# Altium PCB CT310高端控制盒基板电路V1.0.PcbDoc (part 4 of 8)
Units mil, origin at the board's own origin, x right, y up, seen from the top; angles counter-clockwise.
Board outline 8162.61 x 6196.81 mil, 2 copper layers (Top Layer, Bottom Layer), stack 65.792 mil thick; 265 components, 178 nets, 926 pads, 298 vias.
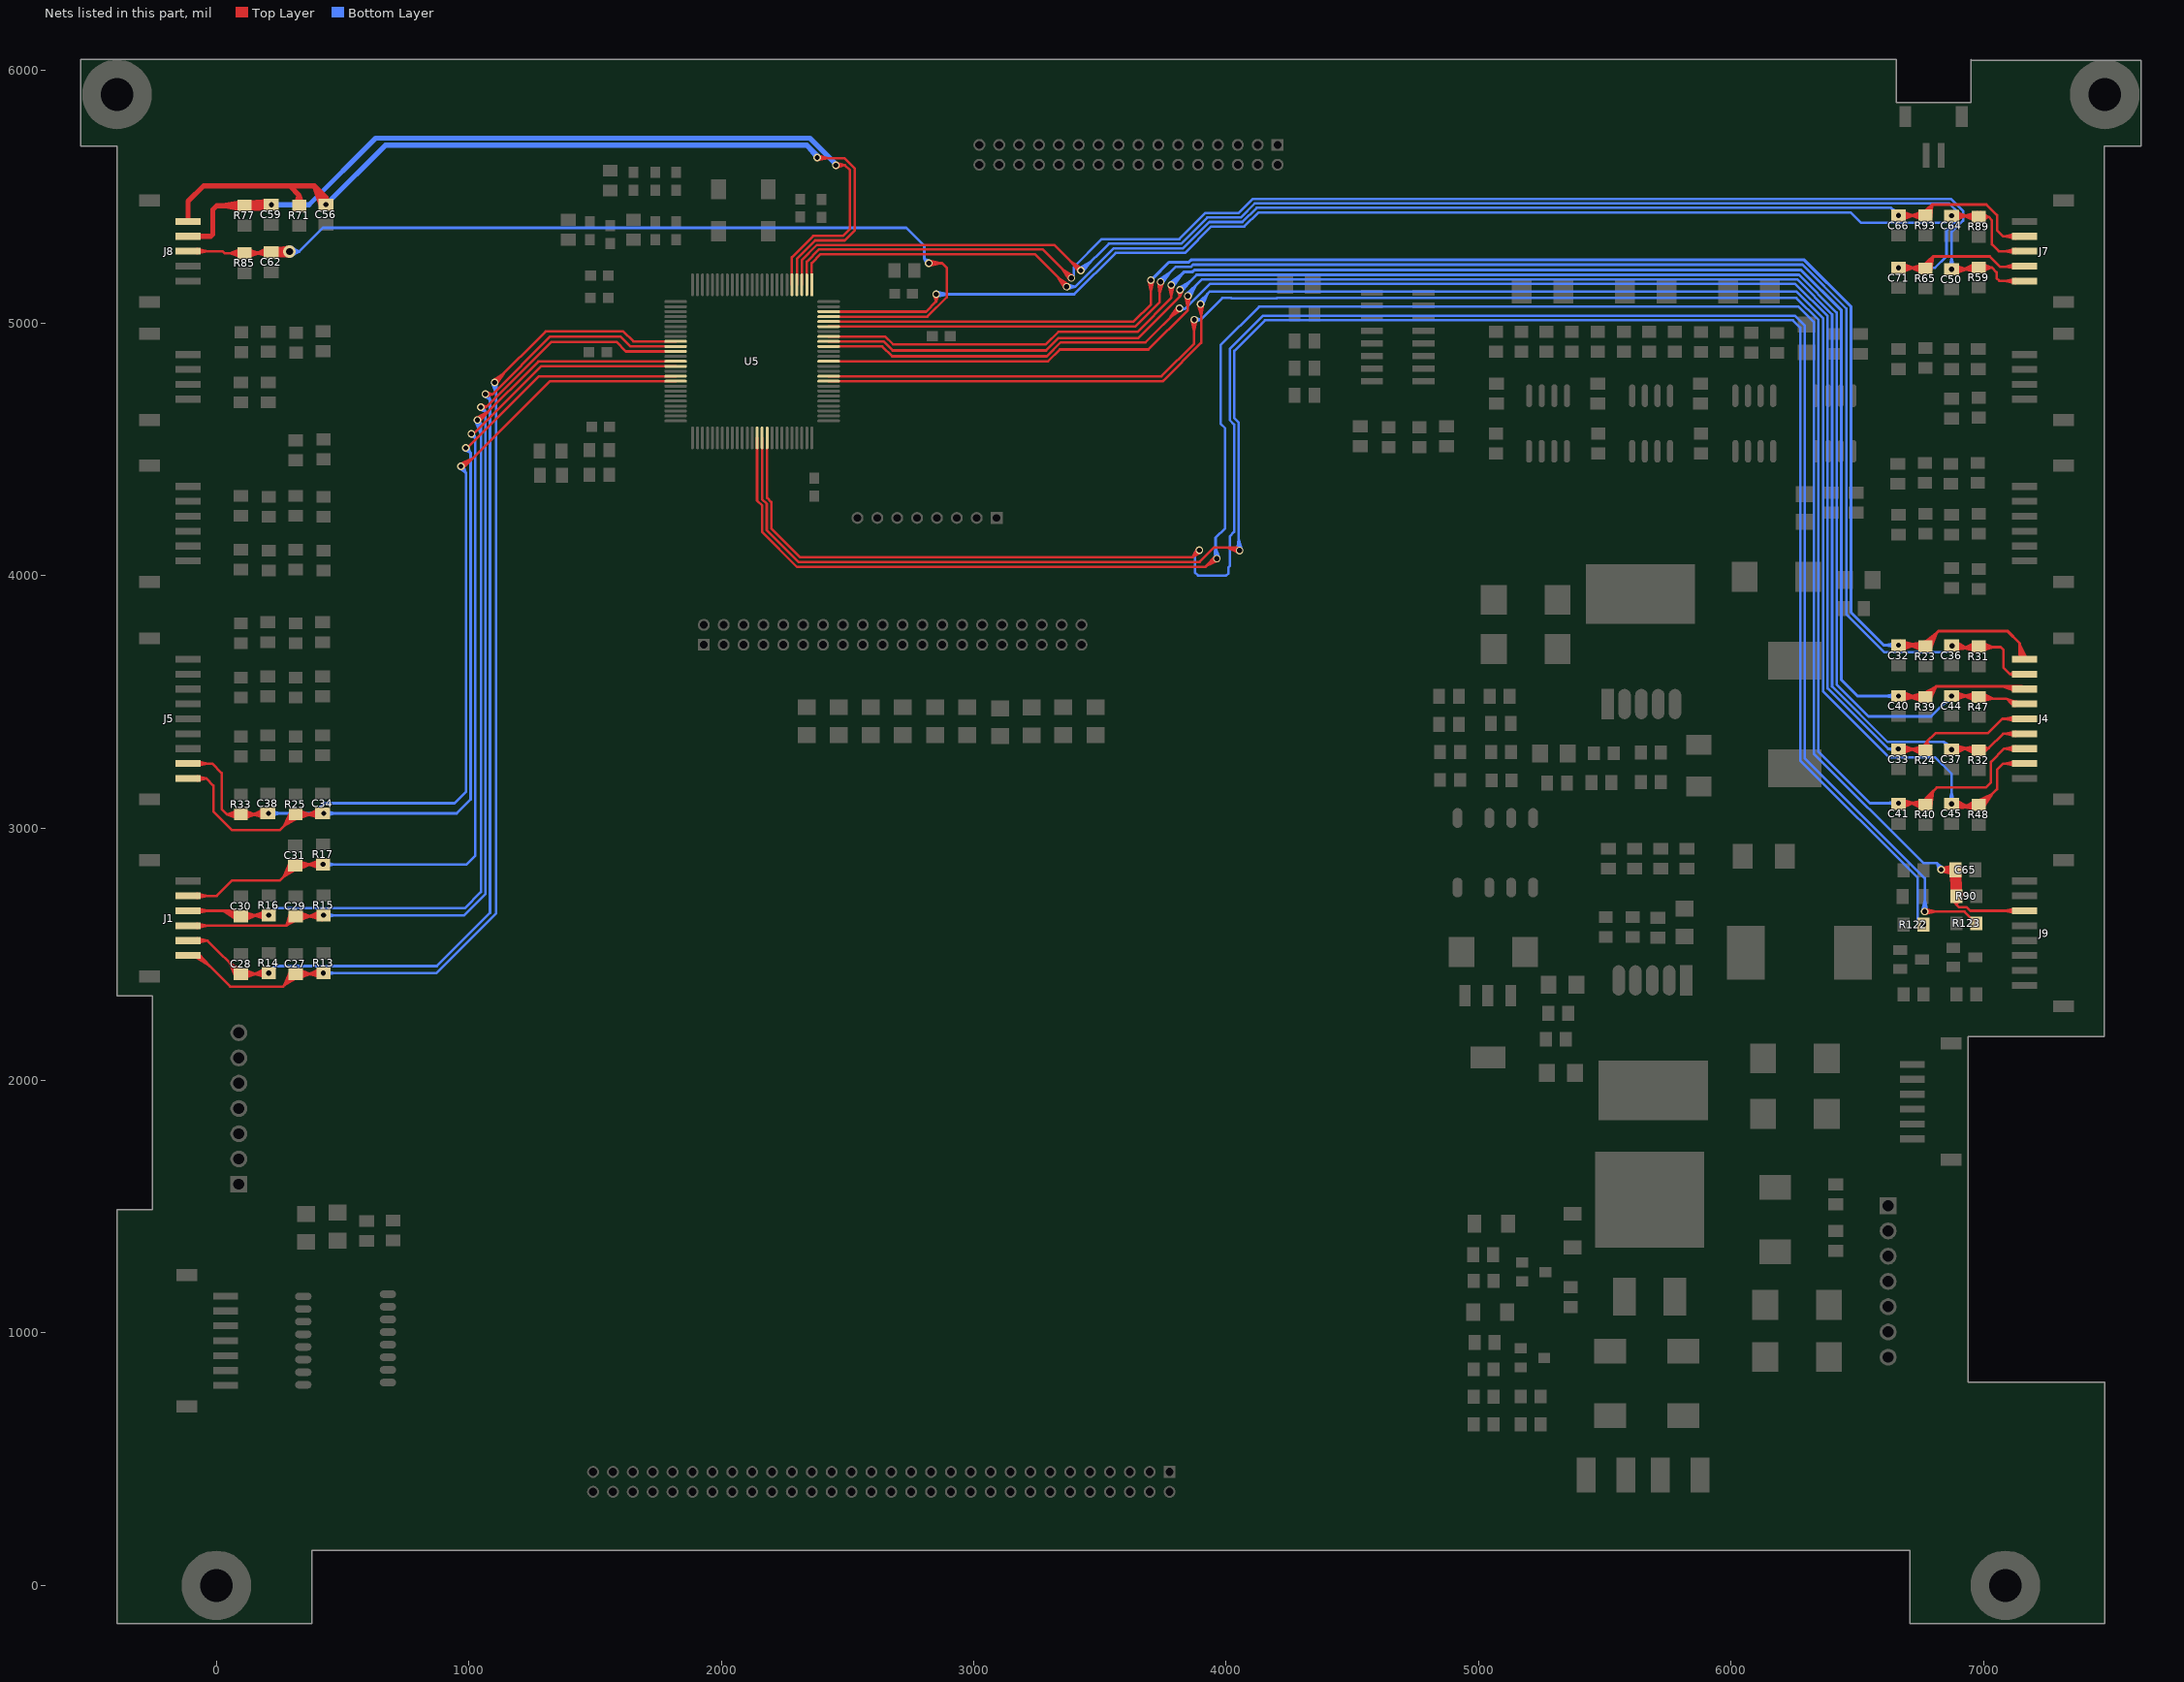
[diagram p4: the nets of this part, all layers, seen from the top]

## Via types
v1: diameter 30, hole 20, Top Layer to Bottom Layer, tented both sides, 226 vias
v2: diameter 60, hole 30, Top Layer to Bottom Layer, tented both sides, 32 vias
v3: diameter 50, hole 30, Top Layer to Bottom Layer, tented both sides, 20 vias
v4: diameter 80, hole 50, Top Layer to Bottom Layer, tented both sides, 10 vias
v5: diameter 50, hole 28, Top Layer to Bottom Layer, tented both sides, 8 vias
v6: diameter 24, hole 16, Top Layer to Bottom Layer, tented both sides, 1 vias
v7: diameter 30, hole 16, Top Layer to Bottom Layer, tented both sides, 1 vias

## Nets (pads, with @x,y where several pads share a name; then routed paths per layer and width w, separated by ;. In a path a pad name is that pad's centre, name@x,y a point inside that pad or via, vN(x,y) a via of type N, cw(c..) or ccw(c..) an arc to the next point about the centre after c; other vN are vias at no path point) (continued)
KEYSWIN_G2: C65.1 J9.3 R90.1 U5.64 | length 10802.8
  Top Layer w10: 2141.98,4470.15 U5.64@2141.98,4505.9 ; U5.64@2141.98,4545.15 2141.98,4296.3 2162,4276.28 2162,4172.18 2300.18,4034 3917,4034 3950,4067 v1(3963,4067) 3921.05,4038.05 ; v1@3956.54,4074.63 3921.05,4038.05 ; v1@3967.85,4058.25 3921.05,4038.05 ; R90.1@6875.21,2720.08 6892.92,2695.67 ; R90.1@6884.39,2724.6 6892.92,2695.67 ; R90.1@6892.92,2725.83 6892.92,2695.67 ; R90.1@6892.92,2729.77 6892.92,2695.67 ; R90.1@6901.46,2724.6 6892.92,2695.67 ; R90.1@6910.64,2720.08 6892.92,2695.67 ; J9.3@7126.21,2663.14 7083.31,2671.88 ; J9.3@7126.21,2680.61 7083.31,2671.88 ; J9.3@7127.09,2671.88 7083.31,2671.88 ; J9.3@7162.52,2671.88 6947.54,2671.88 6932.42,2687 6901.59,2687 6892.92,2695.67
  Top Layer w20: C65.1@6875.37,2828.65 R90.1@6880.56,2744.94 ; C65.1@6875.41,2827.28 R90.1@6888.99,2744.77 ; C65.1@6875.47,2826.73 R90.1@6892.4,2744.8 ; C65.1@6875.84,2824.84 R90.1@6904.33,2745.36 ; R90.1@6879.31,2734.17 C65.1@6888.99,2817.51 ; R90.1@6892.92,2729.77 6888.99,2733.71 C65.1@6888.99,2834.3 ; R90.1@6892.92,2733.71 C65.1@6888.99,2817.51 ; C65.1@6902.38,2825.93 R90.1@6880.56,2744.94 ; C65.1@6902.54,2829.78 R90.1@6904.33,2745.36 ; C65.1@6902.56,2827.28 R90.1@6888.99,2744.77 ; C65.1@6902.6,2827.84 R90.1@6892.4,2744.8 ; R90.1@6906.44,2735.45 C65.1@6888.99,2817.51 ; v1(6832,2835) C65.1@6888.99,2834.3 ; v1(6832,2835) C65.1@6888.99,2834.3 ; v1(6832,2835) 6887.34,2847.82 v1@6832.7,2834.3 ; v1(6832,2835) 6887.34,2820.77 v1@6832.7,2834.3 ; v1(6832,2835) v1@6832.7,2834.3 ; v1@6832.7,2834.3 C65.1@6888.99,2834.3 ; v1@6832.7,2834.3 C65.1@6888.99,2834.3 ; R90.1@6880.56,2744.94 C65.1@6888.99,2828.39 ; R90.1@6888.99,2744.77 C65.1@6888.99,2828.39 ; C65.1@6888.99,2828.39 R90.1@6892.4,2744.8 ; C65.1@6888.99,2828.39 R90.1@6904.33,2745.36
  Bottom Layer w10: v1@3953,4067 3958,4112.8 ; v1@3972.76,4069.16 3958,4112.8 ; v1@6822.81,2831.06 6815.71,2860.29 ; v1@6839.39,2841.74 6815.71,2860.29 ; 3958,4112.8 v1(3963,4067) 3958,4072 3958,4149.54 3995.73,4187.27 3995.73,4583.18 3978,4600.91 3978,4912.11 4130.89,5065 6267.37,5065 6328,5004.37 6328,3294.54 6762.25,2860.29 6815.71,2860.29 ; 6815.71,2860.29 v1(6832,2835) 6832,2844 6815.71,2860.29
KEYSWIN_H1: C27.1 J1.1 R13.1 U5.34 | length 6497
  Top Layer w10: J1.1@-111.93,2494.71 -67.71,2494.71 55,2372 264.3,2372 C27.1@313.97,2421.68 R13.1@423.65,2421.68 ; J1.1@-81.62,2487.58 -26.02,2453.02 ; J1.1@-76.5,2494.71 -26.02,2453.02 ; J1.1@-70.47,2501.09 -26.02,2453.02 ; C27.1@292.27,2431.53 269.14,2376.84 ; C27.1@301.17,2426.84 269.14,2376.84 ; C27.1@308.07,2421.68 269.14,2376.84 ; C27.1@314.15,2415.56 269.14,2376.84 ; C27.1@319.88,2421.68 373.5,2421.68 ; C27.1@320.04,2407.41 269.14,2376.84 ; C27.1@320.57,2413.08 373.5,2421.68 ; C27.1@320.57,2430.27 373.5,2421.68 ; C27.1@323.11,2403.34 373.5,2421.68 ; C27.1@323.11,2440.01 373.5,2421.68 ; R13.1@413.65,2425.11 R13.1@418.46,2407.08 ; R13.1@415.78,2443.67 366.54,2421.68 ; R13.1@419.01,2434.13 366.54,2421.68 ; R13.1@420.27,2416.99 366.54,2421.68 ; R13.1@420.33,2425.61 366.54,2421.68 ; R13.1@421.7,2434.81 376.8,2420.78 ; R13.1@421.83,2434.83 378.38,2421.68 ; R13.1@422.01,2434.86 378.67,2422.56 ; R13.1@422.2,2434.89 366.54,2421.68 ; R13.1@422.38,2434.92 375.81,2423.88 ; R13.1@422.84,2415.03 375.81,2423.88 ; R13.1@423.08,2415.02 378.67,2422.56 ; R13.1@423.28,2415.01 378.38,2421.68 ; R13.1@423.36,2415 366.54,2421.68 ; R13.1@423.49,2415 376.8,2420.78 ; R13.1@424.26,2425.61 v1(423.65,2425) ; R13.1@432.16,2419.74 R13.1@418.46,2407.08 ; v1@1095.65,4772.73 1138.21,4801.21 v1@1109.73,4758.65 ; v1(1102,4765) 1304,4967 1611.59,4967 1651.56,4927.03 U5.34@1819.15,4927.03 ; 1744.15,4927.03 U5.34@1779.9,4927.03 ; 366.54,2421.68 v1(423.65,2425) ; 366.54,2421.68 R13.1@418.46,2407.08 ; 375.81,2423.88 v1(423.65,2425) ; 376.8,2420.78 v1(423.65,2425) ; 378.38,2421.68 v1(423.65,2425) ; 378.67,2422.56 v1(423.65,2425) ; R13.1@418.46,2407.08 v1(423.65,2425)
  Bottom Layer w10: v1(423.65,2425) 870.46,2425 1108,2662.54 v1@1108,4770 ; v1@424.76,2415.06 468.65,2425 v1@424.76,2434.94 ; v1@1092.28,4762.64 1108,4719.13 ; v1(1102,4765) 1108,4719.13 ; v1@1112,4765.22 1108,4719.13
KEYSWIN_H2: C28.1 J1.2 R14.1 U5.35 | length 6509.1
  Top Layer w10: J1.2@-111.93,2553.77 -34.76,2553.77 ; J1.2@-76.5,2553.77 -34.76,2553.77 ; J1.2@-75.58,2545.04 -34.76,2553.77 ; J1.2@-75.58,2562.5 -34.76,2553.77 ; C28.1@75.62,2411.82 52.49,2466.51 ; C28.1@84.52,2416.51 52.49,2466.51 ; C28.1@91.42,2421.68 52.49,2466.51 ; C28.1@97.5,2427.79 52.49,2466.51 ; C28.1@103.23,2421.68 156.85,2421.68 ; C28.1@103.39,2435.94 52.49,2466.51 ; C28.1@103.93,2413.08 156.85,2421.68 ; C28.1@103.93,2430.27 156.85,2421.68 ; C28.1@106.47,2403.34 156.85,2421.68 ; C28.1@106.47,2440.01 156.85,2421.68 ; R14.1@197.63,2426.04 R14.1@201.82,2407.08 ; R14.1@197.79,2423.76 R14.1@199.14,2443.67 ; R14.1@202.37,2434.13 149.88,2421.68 ; R14.1@203.62,2416.99 149.88,2421.68 ; R14.1@203.68,2421.68 C28.1@97.33,2421.68 -34.76,2553.77 ; R14.1@203.68,2425.61 149.88,2421.68 ; R14.1@205.55,2435.4 160.41,2420.76 ; R14.1@205.67,2435.42 162.11,2421.68 ; R14.1@205.85,2435.45 162.68,2422.61 ; R14.1@206.25,2435.52 159.9,2424.06 ; R14.1@206.9,2415.64 159.9,2424.06 ; R14.1@207.17,2415.62 162.68,2422.61 ; R14.1@207.39,2415.61 162.11,2421.68 ; R14.1@207.59,2415.61 160.41,2420.76 ; R14.1@215.32,2431.99 R14.1@199.14,2443.67 ; R14.1@216.07,2420.27 R14.1@201.82,2407.08 ; v1(1066,4718) 1094.6,4718 ; v1@1067.75,4708.15 1094.6,4718 ; v1@1067.75,4727.85 1094.6,4718 ; 1744.15,4907.35 U5.35@1779.9,4907.35 ; U5.35@1819.15,4907.35 1640.24,4907.35 1601.3,4946.3 1322.89,4946.3 1094.6,4718 ; 149.88,2421.68 v1(207.62,2425.61) ; 149.88,2421.68 206.08,2435.49 149.88,2421.68 ; 149.88,2421.68 207.43,2415.61 149.88,2421.68 ; 149.88,2421.68 v1(207.62,2425.61) ; 149.88,2421.68 R14.1@199.14,2443.67 ; 149.88,2421.68 R14.1@201.82,2407.08 ; 159.9,2424.06 v1(207.62,2425.61) ; 160.41,2420.76 v1(207.62,2425.61) ; 162.11,2421.68 v1(207.62,2425.61) ; 162.68,2422.61 v1(207.62,2425.61) ; R14.1@199.14,2443.67 v1(207.62,2425.61) ; R14.1@201.82,2407.08 v1(207.62,2425.61)
  Bottom Layer w10: v1@201.52,2433.54 235.01,2453 ; v1(207.62,2425.61) 235.01,2453 ; v1@215.54,2419.51 235.01,2453 ; v1@1059.41,4710.48 1084,4695.6 ; v1@1063.8,4715.8 1084,4695.6 ; v1(1066,4718) 1084,4695.6 ; v1@1074.77,4722.81 1084,4695.6 ; 235.01,2453 873,2453 1084,2664 1084,4695.6
KEYSWIN_H3: C29.1 J1.3 R15.1 U5.36 | length 6209.3
  Top Layer w10: J1.3@-111.93,2612.82 276.62,2612.82 ; J1.3@-76.5,2612.82 -32.72,2612.82 ; J1.3@-75.62,2604.09 -32.72,2612.82 ; J1.3@-75.62,2621.56 -32.72,2612.82 ; C29.1@291.8,2659.23 276.62,2612.82 ; C29.1@301.01,2655.12 276.62,2612.82 ; C29.1@308.07,2650.18 276.62,2612.82 ; C29.1@314.15,2644.06 276.62,2612.82 ; C29.1@319.77,2635.69 276.62,2612.82 ; C29.1@319.88,2650.18 373.5,2650.18 ; C29.1@320.57,2641.58 373.5,2650.18 ; C29.1@320.57,2658.77 373.5,2650.18 ; C29.1@323.11,2631.84 373.5,2650.18 ; C29.1@323.11,2668.51 373.5,2650.18 ; R15.1@414.27,2654.54 R15.1@418.46,2635.58 ; R15.1@414.44,2652.26 R15.1@415.78,2672.17 ; R15.1@419.01,2662.63 366.52,2650.18 ; R15.1@420.27,2645.49 366.52,2650.18 ; R15.1@420.33,2650.18 C29.1@313.97,2650.18 276.62,2612.82 ; R15.1@420.33,2654.11 366.52,2650.18 ; R15.1@422.2,2663.9 377.06,2649.26 ; R15.1@422.32,2663.92 378.75,2650.18 ; R15.1@422.5,2663.95 379.33,2651.11 ; R15.1@422.89,2664.02 376.55,2652.56 ; R15.1@423.54,2644.14 376.55,2652.56 ; R15.1@423.82,2644.12 379.33,2651.11 ; R15.1@424.03,2644.11 378.75,2650.18 ; R15.1@424.23,2644.11 377.06,2649.26 ; R15.1@431.96,2660.49 R15.1@415.78,2672.17 ; R15.1@432.72,2648.77 R15.1@418.46,2635.58 ; v1(1048,4667) 1069.05,4667 ; v1@1050.37,4657.29 1069.05,4667 ; v1@1050.37,4676.71 1069.05,4667 ; 1744.15,4887.66 U5.36@1779.9,4887.66 ; U5.36@1819.15,4887.66 1621.93,4887.66 1584.3,4925.3 1327.35,4925.3 1069.05,4667 ; 366.52,2650.18 v1(424.26,2654.11) ; 366.52,2650.18 422.73,2663.99 366.52,2650.18 ; 366.52,2650.18 424.08,2644.11 366.52,2650.18 ; 366.52,2650.18 v1(424.26,2654.11) ; 366.52,2650.18 R15.1@415.78,2672.17 ; 366.52,2650.18 R15.1@418.46,2635.58 ; 376.55,2652.56 v1(424.26,2654.11) ; 377.06,2649.26 v1(424.26,2654.11) ; 378.75,2650.18 v1(424.26,2654.11) ; 379.33,2651.11 v1(424.26,2654.11) ; R15.1@415.78,2672.17 v1(424.26,2654.11) ; R15.1@418.46,2635.58 v1(424.26,2654.11)
  Bottom Layer w10: v1(424.26,2654.11) 981.57,2654.11 1066,2738.54 1066,4649 ; v1@425.38,2644.17 469.26,2654.11 v1@425.38,2664.05 ; v1@1042.46,4658.68 1066,4649 ; v1(1048,4667) 1066,4649 ; v1@1056.32,4672.54 1066,4649
KEYSWIN_H4: C30.1 J1.4 R16.1 U5.38 | length 6404.2
  Top Layer w10: J1.4@-111.93,2671.88 75.62,2671.88 93.39,2654.11 v1(207.62,2654.11) ; J1.4@-76.5,2671.88 -32.72,2671.88 ; J1.4@-75.62,2663.14 -32.72,2671.88 ; J1.4@-75.62,2680.61 -32.72,2671.88 ; C30.1@83.29,2633.42 25.41,2671.88 ; C30.1@88.23,2642.17 25.41,2671.88 ; C30.1@91.42,2650.18 25.41,2671.88 ; C30.1@93.6,2658.52 25.41,2671.88 ; C30.1@94.82,2668.49 25.41,2671.88 ; C30.1@103.23,2650.18 156.98,2654.11 ; C30.1@103.29,2658.8 156.98,2654.11 ; C30.1@104.55,2641.65 156.98,2654.11 ; C30.1@105.1,2668.7 156.98,2654.11 ; C30.1@107.78,2632.12 156.98,2654.11 ; R16.1@197.69,2652.95 R16.1@200.45,2672.45 ; R16.1@197.69,2655.27 R16.1@200.45,2635.77 ; R16.1@202.99,2645.52 150.06,2654.11 ; R16.1@202.99,2662.71 150.06,2654.11 ; R16.1@203.68,2654.11 150.06,2654.11 ; R16.1@206.23,2644.21 160.08,2655.74 ; R16.1@206.23,2664.01 160.08,2652.48 ; R16.1@206.91,2644.14 160.08,2652.48 ; R16.1@206.91,2664.09 160.08,2655.74 ; R16.1@215.7,2648.22 R16.1@200.45,2635.77 ; R16.1@215.7,2660 R16.1@200.45,2672.45 ; v1@1028.67,4624.46 1075.63,4648.12 ; v1@1040.83,4608.7 1075.63,4648.12 ; 1744.14,4847.9 U5.38@1779.9,4848.29 ; U5.38@1819.15,4848.29 1818.75,4847.9 1275.41,4847.9 1043.51,4616 v1(1034,4616) 1075.63,4648.12 ; 150.06,2654.11 v1(207.62,2654.11) ; 150.06,2654.11 206.75,2664.07 150.06,2654.11 ; 150.06,2654.11 206.75,2644.15 150.06,2654.11 ; 150.06,2654.11 v1(207.62,2654.11) ; 150.06,2654.11 R16.1@200.45,2672.45 ; 150.06,2654.11 R16.1@200.45,2635.77 ; 160.08,2652.48 v1(207.62,2654.11) ; 160.08,2655.74 v1(207.62,2654.11) ; 162.62,2654.11 v1(207.62,2654.11) ; 162.62,2654.11 206.51,2664.05 162.62,2654.11 ; 162.62,2654.11 206.51,2644.17 162.62,2654.11 ; R16.1@200.45,2635.77 v1(207.62,2654.11) ; R16.1@200.45,2672.45 v1(207.62,2654.11)
  Bottom Layer w10: v1@201.5,2662.02 235.62,2682.11 ; v1(207.62,2654.11) 235.62,2682.11 ; v1@215.53,2647.99 235.62,2682.11 ; v1@1024.51,4612.84 1048,4558.08 ; v1@1043.88,4617.53 1048,4558.08 ; 235.62,2682.11 984.11,2682.11 1048,2746 1048,4602 v1(1034,4616) 1048,4558.08
KEYSWIN_H5: C31.1 J1.5 R17.1 U5.39 | length 5911.7
  Top Layer w10: J1.5@-111.93,2730.93 1.93,2730.93 63,2792 252.05,2792 C31.1@311.97,2851.93 315.91,2855.86 v1(422.26,2855.86) ; J1.5@-76.5,2730.93 -32.72,2730.93 ; J1.5@-75.62,2722.2 -32.72,2730.93 ; J1.5@-75.62,2739.67 -32.72,2730.93 ; C31.1@290.27,2861.78 267.14,2807.09 ; C31.1@299.17,2857.09 267.14,2807.09 ; C31.1@306.07,2851.93 267.14,2807.09 ; C31.1@312.15,2845.81 267.14,2807.09 ; C31.1@317.88,2851.93 371.66,2855.86 ; C31.1@317.94,2860.55 371.66,2855.86 ; C31.1@318.04,2837.66 267.14,2807.09 ; C31.1@319.19,2843.4 371.66,2855.86 ; C31.1@319.75,2870.45 371.66,2855.86 ; C31.1@322.43,2833.87 371.66,2855.86 ; R17.1@412.33,2854.7 R17.1@415.09,2874.2 ; R17.1@412.33,2857.02 R17.1@415.09,2837.52 ; R17.1@417.63,2847.27 364.71,2855.86 ; R17.1@417.63,2864.46 364.71,2855.86 ; R17.1@418.33,2855.86 364.71,2855.86 ; R17.1@420.87,2845.96 374.73,2857.49 ; R17.1@420.87,2865.76 374.73,2854.23 ; R17.1@421.55,2845.89 374.73,2854.23 ; R17.1@421.55,2865.84 374.73,2857.49 ; R17.1@430.35,2849.97 R17.1@415.09,2837.52 ; R17.1@430.35,2861.75 R17.1@415.09,2874.2 ; v1(1010,4561) 1018.6,4561 1285.81,4828.21 1818.75,4828.21 U5.39@1819.15,4828.61 ; 1744.14,4828.21 U5.39@1779.9,4828.61 ; 364.71,2855.86 v1(422.26,2855.86) ; 364.71,2855.86 421.4,2865.82 364.71,2855.86 ; 364.71,2855.86 421.4,2845.9 364.71,2855.86 ; 364.71,2855.86 v1(422.26,2855.86) ; 364.71,2855.86 R17.1@415.09,2874.2 ; 364.71,2855.86 R17.1@415.09,2837.52 ; 374.73,2854.23 v1(422.26,2855.86) ; 374.73,2857.49 v1(422.26,2855.86) ; 377.26,2855.86 v1(422.26,2855.86) ; 377.26,2855.86 421.15,2865.8 377.26,2855.86 ; 377.26,2855.86 421.15,2845.92 377.26,2855.86 ; R17.1@415.09,2837.52 v1(422.26,2855.86) ; R17.1@415.09,2874.2 v1(422.26,2855.86)
  Bottom Layer w10: v1(422.26,2855.86) 990.86,2855.86 1026,2891 1026,4545 ; v1@423.38,2845.92 467.26,2855.86 v1@423.38,2865.8 ; v1@1004.67,4552.54 1026,4545 ; v1(1010,4561) 1026,4545 ; v1@1018.46,4566.33 1026,4545
KEYSWIN_I1: C50.1 J7.5 R59.1 U5.2 | length 7180.5
  Top Layer w10: U5.2@2338.83,5151.44 2338.83,5243.46 2386.37,5291 3274,5291 3375,5190 v1(3387,5178) 3350.79,5214.21 ; U5.2@2338.83,5190.69 2338.83,5226.44 ; v1@3379.27,5171.65 3350.79,5214.21 ; v1@3393.35,5185.73 3350.79,5214.21 ; C50.1@6873.97,5202.69 6921.39,5210.81 ; C50.1@6873.97,5222.64 6921.39,5214.53 ; C50.1@6874.74,5202.77 6921.39,5214.53 ; C50.1@6874.74,5222.56 6921.39,5210.81 ; C50.1@6879.22,5212.67 6932.84,5212.67 ; C50.1@6879.92,5204.07 6932.84,5212.67 ; C50.1@6879.92,5221.26 6932.84,5212.67 ; C50.1@6882.46,5194.33 6932.84,5212.67 ; C50.1@6882.46,5231 6932.84,5212.67 ; R59.1@6970.87,5237.46 6922.09,5212.67 ; R59.1@6974.59,5228.1 6922.09,5212.67 ; R59.1@6975.56,5201.06 6922.09,5212.67 ; R59.1@6976.36,5219.67 6922.09,5212.67 ; R59.1@6976.78,5211.05 6922.09,5212.67 ; R59.1@6984.23,5219.67 7032.93,5219.67 ; R59.1@6985,5211.08 7032.93,5219.67 ; R59.1@6985,5228.25 7032.93,5219.67 ; R59.1@6987.79,5201.39 7032.93,5219.67 ; R59.1@6987.79,5237.94 7032.93,5219.67 ; J7.5@7125.99,5157.47 7083.31,5167.3 ; J7.5@7126.43,5174.94 7083.31,5167.3 ; J7.5@7127.09,5166.18 7083.31,5167.3 ; J7.5@7162.52,5166.18 7161.41,5167.3 7062.3,5167.3 7051.3,5178.3 7051.3,5201.3 7032.93,5219.67 ; v1(6873.32,5212.67) 6921.39,5210.81 ; v1(6873.32,5212.67) 6918.32,5212.67 ; v1(6873.32,5212.67) 6921.39,5214.53 ; v1(6873.32,5212.67) 6973.3,5212.67 R59.1@6980.3,5219.67 7032.93,5219.67 ; 6918.32,5212.67 6874.43,5202.73 6918.32,5212.67 ; 6918.32,5212.67 6874.43,5222.6 6918.32,5212.67
  Bottom Layer w10: 3396,5190 3396,5220.6 3507.4,5332 3814,5332 3918,5436 4049.56,5436 4105.56,5492 6871.04,5492 6919.32,5443.72 6919.32,5405.61 6873.32,5359.61 v1(6873.32,5212.67) ; v1@6863.38,5213.78 6873.32,5257.67 v1@6883.25,5213.78
KEYSWIN_I2: C71.1 J7.4 R65.1 U5.3 | length 7708.2
  Top Layer w10: U5.3@2319.15,5151.44 2319.15,5249.23 2378.91,5309 3319,5309 v1@3421.5,5206.5 ; U5.3@2319.15,5190.69 2319.15,5226.44 ; v1@3416.63,5201.24 3385.97,5242.03 ; v1(3424,5208) 3385.97,5242.03 ; v1@3429.91,5216.07 3385.97,5242.03 ; C71.1@6663.95,5208.69 6711.37,5216.81 ; C71.1@6663.95,5228.64 6711.37,5220.53 ; C71.1@6664.72,5208.77 6711.37,5220.53 ; C71.1@6664.72,5228.56 6711.37,5216.81 ; C71.1@6669.2,5218.67 6722.82,5218.67 ; C71.1@6669.89,5210.07 6722.82,5218.67 ; C71.1@6669.89,5227.26 6722.82,5218.67 ; C71.1@6672.43,5200.33 6722.82,5218.67 ; C71.1@6672.43,5237 6722.82,5218.67 ; R65.1@6759.5,5227.09 6799.8,5263.8 ; R65.1@6762.1,5197.53 6712.62,5218.67 ; R65.1@6764.14,5234.16 6712.62,5218.67 ; R65.1@6765.17,5207.12 6712.62,5218.67 ; R65.1@6766.13,5224.28 6712.62,5218.67 ; R65.1@6766.34,5215.67 6712.62,5218.67 ; R65.1@6766.94,5220.3 6799.8,5263.8 ; R65.1@6774.21,5215.67 6799.8,5263.8 ; R65.1@6782.12,5212.23 6799.8,5263.8 ; R65.1@6791.91,5209.86 6799.8,5263.8 ; J7.4@7125.63,5233.9 7083.29,5222.3 ; J7.4@7126.8,5216.47 7083.29,5222.3 ; J7.4@7127.09,5225.24 7083.29,5222.3 ; J7.4@7162.52,5225.24 7159.58,5222.3 7066.3,5222.3 7024.8,5263.8 6799.8,5263.8 ; v1(6663.3,5218.67) 6708.3,5218.67 ; v1(6663.3,5218.67) 6711.37,5216.81 ; v1(6663.3,5218.67) 6711.37,5220.53 ; v1(6663.3,5218.67) 6767.28,5218.67 R65.1@6770.28,5215.67 6770.28,5234.28 6799.8,5263.8 ; 6708.3,5218.67 6664.41,5208.73 6708.3,5218.67 ; 6708.3,5218.67 6664.41,5228.6 6708.3,5218.67
  Bottom Layer w10: v1@3418.2,5216.15 3462.57,5241.57 ; v1@3431.27,5201.14 3462.57,5241.57 ; v1(6663.3,5218.67) 6807.67,5218.67 6853,5264 6853,5364.75 6901.32,5413.07 6901.32,5436.26 6863.58,5474 4113.02,5474 4057.02,5418 3925.46,5418 3821.46,5314 3535,5314 3429,5208 v1(3424,5208) 3462.57,5241.57 ; v1@6664.41,5208.73 6708.3,5218.67 v1@6664.41,5228.6
KEYSWIN_J1: C56.1 J8.5 R71.1 U5.4 | length 4740
  Top Layer w10: U5.4@2299.46,5151.44 2299.46,5255 2371.46,5327 2489,5327 2529,5367 2529,5612 2488,5653 2382,5653 v1(2380,5655) 2425.11,5653 ; U5.4@2299.46,5190.69 2299.46,5226.44 ; v1@2380.67,5645.02 2425.11,5653 ; v1@2381.55,5664.88 2425.11,5653
  Top Layer w20: J8.5@-111.93,5402.41 -111.93,5482.07 -51,5543 291,5543 ; R71.1@314.5,5466.97 327.94,5506.06 ; R71.1@327.94,5464.73 327.94,5506.06 ; R71.1@341.38,5466.97 327.94,5506.06 ; 390.63,5538.17 v1(434.3,5468.67) ; 393.11,5535.24 v1(434.3,5468.67) ; 393.55,5537 v1(434.3,5468.67) ; C56.1@428.39,5468.67 389,5543 ; C56.1@439.87,5476 389,5543 ; 291,5543 327.94,5506.06 ; 291,5543 389,5543 ; 389,5543 415.88,5463.28 v1(434.3,5468.67) ; 389,5543 434.3,5497.7 ; v1(434.3,5468.67) 434.3,5497.7 ; v1(434.3,5468.67) 434.3,5497.7 ; v1(434.3,5468.67) 434.3,5497.7 ; v1(434.3,5468.67) 434.3,5497.7 ; v1(434.3,5468.67) 434.3,5497.7 ; v1(434.3,5468.67) 434.3,5497.7 ; 434.3,5497.7 447.54,5471.86 434.3,5497.7 ; 434.3,5497.7 421.05,5471.86 434.3,5497.7
  Bottom Layer w20: v1(434.3,5468.67) 669.63,5704 2339.88,5704 ; v1(2380,5655) 2339.88,5704 ; v1@2384.44,5659.44 2339.88,5704
KEYSWIN_J2: C59.1 J8.4 R77.1 U5.5 | length 6552
  Top Layer w10: U5.5@2279.78,5151.44 2279.78,5260.78 2364,5345 2481,5345 2510,5374 2510,5605 2490,5625 ; U5.5@2279.78,5190.69 2279.78,5226.44 ; v1(2454,5625) 2490,5625 ; v1@2455.39,5615.1 2490,5625 ; v1@2455.39,5634.9 2490,5625
  Top Layer w20: J8.4@-111.93,5343.35 -21.65,5343.35 ; J8.4@-76.5,5343.35 -21.65,5343.35 ; R77.1@106.25,5451.15 23.74,5464.73 ; R77.1@106.25,5478.31 23.74,5464.73 ; R77.1@107.36,5464.73 23.74,5464.73 ; R77.1@115.23,5464.73 C59.1@198.85,5464.73 ; R77.1@116.34,5451.15 C59.1@198.85,5464.73 ; R77.1@116.34,5478.31 C59.1@198.85,5464.73 ; R77.1@132.86,5475.59 v1(218.31,5468) ; R77.1@137.03,5463.65 v1(218.31,5468) ; R77.1@137.03,5463.67 v1(218.31,5468) ; R77.1@138.85,5453.45 v1(218.31,5468) ; 142.94,5464.73 v1(218.31,5468) ; 143.06,5464.73 v1(218.31,5468) ; 143.58,5475 v1(218.31,5468) ; 143.92,5456.02 v1(218.31,5468) ; 144.12,5455.72 v1(218.31,5468) ; C59.1@208.17,5481.81 R77.1@129,5453.23 ; C59.1@209.4,5455.25 R77.1@127.14,5476.53 ; C59.1@211.91,5482.29 R77.1@127.14,5476.53 ; C59.1@213.15,5455.12 R77.1@129,5453.23 ; C59.1@213.71,5464.73 R77.1@111.29,5464.73 1.73,5464.73 -14,5449 -14,5351 -21.65,5343.35 ; C59.1@217.65,5468.67 v1(218.31,5468) ; R77.1@127.14,5476.53 v1(218.31,5468) ; R77.1@127.14,5476.53 v1(218.31,5468) ; R77.1@127.14,5476.53 C59.1@211.74,5468.67 ; R77.1@127.76,5464.73 v1(218.31,5468) ; R77.1@127.76,5464.73 C59.1@211.74,5468.67 ; R77.1@127.76,5464.73 210.01,5482.18 R77.1@127.96,5464.73 ; R77.1@127.76,5464.73 211.28,5455.05 R77.1@127.96,5464.73 ; R77.1@127.96,5464.73 v1(218.31,5468) ; R77.1@127.96,5464.73 C59.1@211.74,5468.67 ; R77.1@129,5453.23 v1(218.31,5468) ; R77.1@129,5453.23 C59.1@211.74,5468.67 ; C59.1@198.85,5464.73 v1(218.31,5468) ; C59.1@198.85,5464.73 v1(218.31,5468) ; C59.1@198.85,5464.73 v1(218.31,5468) ; v1(218.31,5468) 143.3,5465.46 v1(218.31,5468)
  Bottom Layer w20: v1(218.31,5468) 367,5468 631,5732 2351.47,5732 v1@2456.24,5627.24
KEYSWIN_M2: C62.1 J8.3 R85.1 U5.97 | length 7023.8
  Top Layer w10: J8.3@-111.93,5284.3 25,5284.3 32.57,5276.73 R85.1@111.29,5276.73 213.71,5276.73 C62.1@217.65,5280.67 v5@283.67,5280.67 ; J8.3@-76.5,5284.3 -32.72,5284.3 ; J8.3@-75.62,5275.56 -32.72,5284.3 ; J8.3@-75.62,5293.03 -32.72,5284.3 ; R85.1@104.12,5258.39 53.73,5276.73 ; R85.1@104.12,5295.07 53.73,5276.73 ; R85.1@106.66,5268.14 53.73,5276.73 ; R85.1@106.66,5285.32 53.73,5276.73 ; R85.1@107.36,5276.73 53.73,5276.73 ; R85.1@115.23,5276.73 168.85,5276.73 ; R85.1@115.92,5268.14 168.85,5276.73 ; R85.1@115.92,5285.32 168.85,5276.73 ; R85.1@118.46,5258.39 168.85,5276.73 ; R85.1@118.46,5295.07 168.85,5276.73 ; C62.1@207.2,5298.72 157.96,5276.73 ; C62.1@209.88,5262.14 157.96,5276.73 ; C62.1@210.43,5289.19 157.96,5276.73 ; C62.1@211.68,5272.04 157.96,5276.73 ; C62.1@211.74,5280.67 157.96,5276.73 ; C62.1@223.56,5280.67 v5@277.18,5280.67 ; C62.1@224.25,5272.07 v5@277.18,5280.67 ; C62.1@224.25,5289.26 v5@277.18,5280.67 ; C62.1@226.79,5262.33 v5@277.18,5280.67 ; C62.1@226.79,5299.01 v5@277.18,5280.67 ; v5@280.62,5300.66 C62.1@236.29,5265.79 ; v5@282.02,5264.66 C62.1@234.94,5296.04 ; v5@283.2,5301.81 C62.1@235.41,5273.88 ; v5@284.79,5263.69 C62.1@234.68,5287.57 ; v5@286.12,5292.21 C62.1@236.29,5265.79 ; v5@286.84,5273.51 C62.1@234.94,5296.04 ; v5@287.47,5292.67 C62.1@235.41,5273.88 ; v5@288.03,5302.9 C62.1@234.68,5287.57 ; v5@288.28,5273.15 C62.1@234.68,5287.57 ; v5@289.68,5263 C62.1@235.41,5273.88 ; v5@289.92,5293 C62.1@234.68,5287.57 ; v5@290.75,5273.03 C62.1@235.41,5273.88 ; v5@291.1,5302.97 C62.1@234.94,5296.04 ; v5@291.44,5292.9 C62.1@234.94,5296.04 ; v5@292.2,5273.24 C62.1@236.29,5265.79 ; v5@292.63,5263.17 C62.1@236.29,5265.79 ; U5.97@2425.44,5025.46 2502.46,5025.46 2502.46,5025.09 2816.55,5025.09 2893,5101.54 2893,5219 2875,5237 v1@2827,5237 ; U5.97@2464.69,5025.46 2500.44,5025.46 ; v1(2822,5237) 2867,5237 ; v1@2823.11,5227.06 2867,5237 ; v1@2823.11,5246.94 2867,5237 ; C62.1@234.68,5287.57 v5(290,5283) ; C62.1@234.91,5280.67 v5(290,5283) ; C62.1@234.91,5280.67 288.67,5292.91 C62.1@234.94,5280.67 ; C62.1@234.91,5280.67 289.52,5273.01 C62.1@234.94,5280.67 ; C62.1@234.91,5280.67 285.54,5302.5 C62.1@234.94,5280.67 ; C62.1@234.91,5280.67 287.21,5263.2 C62.1@234.94,5280.67 ; C62.1@234.94,5280.67 v5(290,5283) ; C62.1@234.94,5296.04 v5(290,5283) ; C62.1@235.41,5273.88 v5(290,5283) ; C62.1@236.29,5265.79 v5(290,5283)
  Bottom Layer w10: v5(290,5283) 327.83,5283 ; v5@291.32,5273.09 327.83,5283 ; v5@291.32,5292.91 327.83,5283 ; v5@295.29,5263.71 327.83,5283 ; v5@295.29,5302.29 327.83,5283 ; v1@2813.68,5231.46 2804,5255 ; v1@2827.54,5245.32 2804,5255 ; 327.83,5283 421.83,5377 2733,5377 2804,5306 2804,5255 ; 2804,5255 v1(2822,5237) 2804,5255
KEYSWIN_M3: C64.1 J7.3 R89.1 U5.98 | length 6744.2
  Top Layer w10: U5.98@2425.44,5045.14 2425.44,5045 2811,5045 2851,5085 ; U5.98@2464.69,5045.14 2500.44,5045 ; v1@2841.15,5112.28 2851,5085 ; v1@2860.85,5112.28 2851,5085 ; C64.1@6873.97,5414.69 6921.39,5422.81 ; C64.1@6873.97,5434.64 6921.39,5426.53 ; C64.1@6874.74,5414.77 6921.39,5426.53 ; C64.1@6874.74,5434.56 6921.39,5422.81 ; C64.1@6879.22,5424.67 6932.84,5424.67 ; C64.1@6879.92,5416.07 6932.84,5424.67 ; C64.1@6879.92,5433.26 6932.84,5424.67 ; C64.1@6882.46,5406.33 6932.84,5424.67 ; C64.1@6882.46,5443.01 6932.84,5424.67 ; R89.1@6971.79,5402.61 6922.55,5424.67 ; R89.1@6974.51,5439.2 6922.55,5424.67 ; R89.1@6975.03,5412.15 6922.55,5424.67 ; R89.1@6976.31,5429.29 6922.55,5424.67 ; R89.1@6976.36,5420.67 6922.55,5424.67 ; R89.1@6984.23,5420.67 7019.3,5420.67 ; R89.1@6985.29,5412.11 7019.3,5420.67 ; R89.1@6985.29,5429.22 7019.3,5420.67 ; R89.1@6989.18,5402.71 7019.3,5420.67 ; R89.1@6989.18,5438.62 7019.3,5420.67 ; J7.3@7126.21,5275.56 7083.31,5284.3 ; J7.3@7126.21,5293.03 7083.31,5284.3 ; J7.3@7127.09,5284.3 7083.31,5284.3 ; J7.3@7162.52,5284.3 7060.3,5284.3 7033.3,5311.3 7033.3,5406.67 7019.3,5420.67 ; 2851,5085 v1(2851,5114) 2851,5085 ; v1(6873.32,5424.67) 6918.32,5424.67 ; v1(6873.32,5424.67) 6921.39,5422.81 ; v1(6873.32,5424.67) 6921.39,5426.53 ; v1(6873.32,5424.67) 6976.29,5424.67 R89.1@6980.29,5420.67 7019.3,5420.67 ; 6918.32,5424.67 6874.43,5414.73 6918.32,5424.67 ; 6918.32,5424.67 6874.43,5434.6 6918.32,5424.67
  Bottom Layer w10: v1(2851,5114) 3397.97,5114 3561.97,5278 3836.37,5278 3940.37,5382 4071.93,5382 4127.93,5438 6473.72,5438 6514.02,5397.7 6846.35,5397.7 ; v1@2852.11,5104.06 2896,5114 v1@2852.11,5123.94 ; v1@6865.38,5430.75 6846.35,5397.7 ; v1@6879.4,5416.73 6846.35,5397.7 ; 6846.35,5397.7 v1(6873.32,5424.67) 6846.35,5397.7
KEYSWIN_M4: C66.1 J7.2 R93.1 U5.1 | length 7066.9
  Top Layer w10: U5.1@2358.52,5151.44 2358.52,5237.69 2393.82,5273 3242,5273 3368,5147 v1(3368,5144) 3333.4,5181.6 ; U5.1@2358.52,5190.69 2358.52,5226.44 ; v1@3360.01,5137.98 3333.4,5181.6 ; v1@3374.66,5151.46 3333.4,5181.6 ; v1(6663.3,5425.7) R93.1@6770.27,5425.67 6770.27,5443.27 6796.3,5469.3 ; C66.1@6663.94,5415.73 6711.39,5423.81 ; C66.1@6663.96,5435.68 6711.35,5427.53 ; C66.1@6664.71,5415.81 6711.35,5427.53 ; C66.1@6664.73,5435.6 6711.39,5423.81 ; C66.1@6669.2,5425.67 6722.82,5425.67 ; C66.1@6669.89,5417.07 6722.82,5425.67 ; C66.1@6669.89,5434.26 6722.82,5425.67 ; C66.1@6672.43,5407.33 6722.82,5425.67 ; C66.1@6672.43,5444.01 6722.82,5425.67 ; R93.1@6759.5,5437.09 6796.3,5469.3 ; R93.1@6763.1,5407.33 6712.71,5425.67 ; R93.1@6763.1,5444 6712.71,5425.67 ; R93.1@6765.64,5417.07 6712.71,5425.67 ; R93.1@6765.64,5434.26 6712.71,5425.67 ; R93.1@6766.34,5425.67 6712.71,5425.67 ; R93.1@6766.89,5430.22 6796.3,5469.3 ; R93.1@6774.21,5425.67 6796.3,5469.3 ; R93.1@6782.22,5422.47 6796.3,5469.3 ; R93.1@6792.12,5420.57 6796.3,5469.3 ; J7.2@7126.21,5334.61 7083.31,5343.35 ; J7.2@7126.21,5352.09 7083.31,5343.35 ; J7.2@7127.09,5343.35 7083.31,5343.35 ; J7.2@7162.52,5343.35 7077.24,5343.35 7053.3,5367.3 7053.3,5427.3 7011.3,5469.3 6796.3,5469.3 ; v1(6663.3,5425.7) 6708.3,5425.67 ; v1(6663.3,5425.7) 6708.3,5425.67 ; v1(6663.3,5425.7) 6711.39,5423.81 ; v1(6663.3,5425.7) 6711.35,5427.53 ; 6708.3,5425.67 6664.4,5415.77 6708.3,5425.67 ; 6708.3,5425.67 6664.42,5435.64 6708.3,5425.67
  Bottom Layer w10: v1(3368,5144) 3402.51,5144 ; v1@3369.45,5134.11 3402.51,5144 ; v1@3369.45,5153.89 3402.51,5144 ; v1@6655.45,5419.51 6633,5456 ; v1@6657.59,5431.41 6633,5456 ; v1(6663.3,5425.7) 6633,5456 ; v1@6669.49,5433.55 6633,5456 ; 3402.51,5144 3554.51,5296 3828.91,5296 3932.91,5400 4064.47,5400 4120.47,5456 6633,5456
KEYSWLED_G1: R122.2 U5.65 | length 8418.1
  Top Layer w10: 2161.67,4470.15 U5.65@2161.67,4505.9 ; U5.65@2161.67,4545.15 2161.67,4302.07 2180,4283.73 2180,4179.63 2305.63,4054 3895,4054 3952,4111 4041,4111 v1(4053,4099) 4004.85,4111 ; v1@4049.62,4089.59 4004.85,4111 ; v1@4054.43,4108.9 4004.85,4111 ; R122.2@6761.67,2617.3 v1(6762.3,2617.3)
  Bottom Layer w10: v1@4043.01,4099.38 4049.73,4144.42 ; v1@4062.83,4100.81 4049.73,4144.42 ; v1@6754.23,2611.38 6739,2640.59 ; v1@6768.21,2625.36 6739,2640.59 ; 4049.73,4144.42 v1(4053,4099) 4049.73,4102.27 4049.73,4605.55 4032,4623.28 4032,4889.74 4153.26,5011 6245,5011 6274,4982 6274,3268 6739,2803 6739,2640.59 ; 6739,2640.59 v1(6762.3,2617.3) 6739,2640.59
KEYSWLED_G2: R123.2 U5.66 | length 8752.7
  Top Layer w10: 2181.35,4470.15 U5.66@2181.35,4505.9 ; U5.66@2181.35,4545.15 2181.35,4307.84 2198,4291.19 2198,4187.09 2313.09,4072 3866,4072 ; v1@3886.09,4106.12 3866,4072 ; v1@3892,4098 3866,4072 ; v1(3894,4100) 3866,4072 ; v1@3900.12,4092.09 3866,4072 ; v1(6767,2669) 6924.96,2669 R123.2@6971.66,2622.3 ; v1@6768.11,2659.06 6812,2669 v1@6768.11,2678.94
  Bottom Layer w10: v1@3886.68,4106.81 3876,4088 ; v1@3897.47,4090.62 3876,4088 ; v1@6757.06,2670.11 6767,2714 v1@6776.94,2670.11 ; v1(6767,2669) 6767,2800.46 6292,3275.46 6292,4989.46 6252.46,5029 4145.8,5029 4014,4897.2 4014,4615.82 4031.73,4598.1 4031.73,4172.36 4014,4154.63 4014,4037.54 4009,4032.54 4009,4009 4000,4000 3888,4000 3876,4012 3876,4088 ; 3876,4088 v1(3894,4100) 3888,4100 3876,4088
KJ_A1: C32.1 J4.1 R23.1 U5.96 | length 8041.8
  Top Layer w10: U5.96@2425.44,5005.77 3633.32,5005.77 3702,5074.46 v1(3702,5170) ; U5.96@2464.69,5005.77 2500.44,5005.77 ; v1@3692.06,5168.89 3702,5125 v1@3711.94,5168.89
  Top Layer w12: C32.1@6656.48,3730.17 C32.1@6671.01,3740.13 ; C32.1@6663.3,3722.6 v1(6663.3,3724.29) ; C32.1@6663.3,3725.3 6767.3,3725.3 6822.3,3780.3 7094.7,3780.3 7143.3,3731.7 7143.3,3687.74 ; C32.1@6663.78,3733.28 6728.89,3725.3 ; C32.1@6663.91,3733.27 6714.32,3725.3 ; C32.1@6664.03,3733.26 6714.45,3724.64 ; C32.1@6664.05,3715.33 6728.89,3725.3 ; C32.1@6664.15,3715.33 6714.45,3724.64 ; C32.1@6664.27,3715.35 6714.32,3725.3 ; C32.1@6669.2,3722.6 6728.89,3725.3 ; C32.1@6672.13,3722.55 C32.1@6671.01,3740.13 ; C32.1@6672.58,3705.31 6728.89,3725.3 ; R23.1@6761.6,3730.98 6812.93,3770.93 ; R23.1@6761.88,3701.62 6706.23,3725.3 ; R23.1@6765.7,3736.28 6706.23,3725.3 ; R23.1@6766.34,3718.67 6706.23,3725.3 ; R23.1@6774.21,3718.67 6812.93,3770.93 ; R23.1@6789.66,3710.19 6812.93,3770.93 ; J4.1@7155.01,3666.49 7143.3,3724.91 ; J4.1@7169.71,3671.5 7143.3,3724.91 ; v1(6663.3,3724.29) 6714.32,3725.3 ; v1(6663.3,3724.29) 6714.45,3724.64 ; v1(6663.3,3724.29) C32.1@6671.01,3740.13 ; v1(6663.3,3724.29) 6728.89,3725.3 ; C32.1@6671.01,3740.13 6728.89,3725.3 ; 7143.3,3687.74 7167.18,3674.75 7143.3,3687.74 ; 7143.3,3687.74 7156.29,3663.86 7143.3,3687.74 ; 7143.3,3687.74 J4.1@7162.52,3668.52 ; 7143.3,3687.74 J4.1@7162.52,3668.52 ; 7143.3,3724.91 J4.1@7162.52,3668.52
  Bottom Layer w12: v1(3702,5170) 3702,5177 3709,5177 3773,5241 3851.69,5241 3860.69,5250 5381.85,5250 6290.26,5250 6475,5065.26 6475,3854 6604.71,3724.29 v1(6663.3,3724.29) 6612.3,3724.29 ; v1@6662.5,3715.33 6612.3,3724.29 ; v1@6662.5,3733.26 6612.3,3724.29
KJ_A2: C36.1 J4.2 R31.1 U5.95 | length 8390.4
  Top Layer w10: U5.95@2425.44,4986.09 3639.09,4986.09 3737,5084 v1@3737,5163 ; U5.95@2464.69,4986.09 2500.44,4986.09 ; v1@3730.01,5162.56 3737,5117.8 ; v1(3740,5163) 3737,5117.8 ; v1@3749.84,5161.24 3737,5117.8 ; C36.1@6866.16,3716.18 C36.1@6878.56,3703.99 ; C36.1@6873.32,3722.6 v1(6874.92,3721) ; C36.1@6873.93,3711.05 6922.03,3711.3 ; C36.1@6874.05,3711.04 6920.71,3711.99 ; C36.1@6874.14,3711.03 6935.03,3711.3 ; C36.1@6874.56,3711.01 6919.83,3714.38 ; C36.1@6874.81,3711 6923.71,3715.45 ; C36.1@6877.06,3730.77 6923.71,3715.45 ; C36.1@6877.32,3730.71 6935.03,3711.3 ; C36.1@6877.46,3730.67 6919.83,3714.38 ; C36.1@6877.89,3730.55 6920.71,3711.99 ; C36.1@6877.94,3730.53 6922.03,3711.3 ; C36.1@6878.16,3714.05 6935.03,3711.3 ; C36.1@6879.22,3722.6 6935.03,3711.3 ; C36.1@6881.57,3730.9 6935.03,3711.3 ; C36.1@6884.89,3720.19 C36.1@6878.56,3703.99 ; C36.1@6885.86,3740 6935.03,3711.3 ; C36.1@6889.3,3711.3 6974.3,3711.3 6979.3,3716.3 7068.3,3716.3 7078.3,3706.3 7078.3,3635.3 7104.13,3609.46 ; R31.1@6970.75,3736.42 6922.13,3711.3 ; R31.1@6974.53,3727.09 6922.13,3711.3 ; R31.1@6975.69,3700.06 6922.13,3711.3 ; R31.1@6976.36,3718.67 6922.13,3711.3 ; R31.1@6976.84,3710.06 6922.13,3711.3 ; R31.1@6984.23,3718.67 7037.9,3716.3 ; R31.1@6984.54,3710.05 7037.9,3716.3 ; R31.1@6985.3,3727.22 7037.9,3716.3 ; R31.1@6986.65,3700.2 7037.9,3716.3 ; R31.1@6988.27,3736.85 7037.9,3716.3 ; J4.2@7125.41,3600.84 7104.13,3609.46 ; J4.2@7125.41,3618.08 7104.13,3609.46 ; J4.2@7127.09,3609.46 7104.13,3609.46 ; J4.2@7162.52,3609.46 7104.13,3609.46 ; v1(6874.92,3721) 6919.83,3714.38 ; v1(6874.92,3721) 6920.71,3711.99 ; v1(6874.92,3721) 6923.71,3715.45 ; v1(6874.92,3721) C36.1@6878.56,3703.99 ; v1(6874.92,3721) 6935.03,3711.3 ; v1(6874.92,3721) 6922.03,3711.3 ; C36.1@6878.56,3703.99 6935.03,3711.3
  Bottom Layer w10: v1@3733.65,5170.73 3776.21,5199.21 v1@3747.73,5156.65 ; v1(3740,5163) 3799,5222 3859.56,5222 3868.56,5231 6282.39,5231 6456,5057.39 6456,3846.13 6605.84,3696.29 6850.21,3696.29 ; v1@6866.91,3726.99 6850.21,3696.29 ; v1@6880.91,3712.99 6850.21,3696.29 ; 6850.21,3696.29 v1(6874.92,3721) 6850.21,3696.29
KJ_A3: C40.1 J4.3 R39.1 U5.93 | length 8415
  Top Layer w10: U5.93@2425.44,4946.72 2649.19,4946.72 2680.3,4915.61 3285.61,4915.61 3335,4965 3648,4965 3782,5099 v1(3782,5151) 3782,5106 ; U5.93@2464.69,4946.72 2500.44,4946.72 ; v1@3772.06,5149.89 3782,5106 ; v1@3791.94,5149.89 3782,5106
  Top Layer w12: C40.1@6656.05,3517.26 C40.1@6670.64,3505.04 ; C40.1@6656.65,3528.67 C40.1@6672.93,3539.82 ; C40.1@6663.57,3513.61 6714.24,3519.64 ; C40.1@6664.61,3531.51 6714.24,3519.64 ; C40.1@6664.76,3531.48 6714.8,3518.67 ; C40.1@6667.23,3518.67 R39.1@6770.28,3518.67 6811.83,3560.22 ; C40.1@6669.2,3522.6 6728.98,3518.67 ; C40.1@6671.95,3520.11 C40.1@6672.93,3539.82 ; C40.1@6672.19,3524.01 C40.1@6670.64,3505.04 ; R39.1@6763.17,3532.4 6811.83,3560.22 ; R39.1@6763.73,3501.24 6706.72,3518.67 ; R39.1@6763.73,3536.09 6706.72,3518.67 ; R39.1@6766.34,3518.67 6706.72,3518.67 ; R39.1@6774.21,3518.67 6811.83,3560.22 ; R39.1@6788.97,3509.04 6811.83,3560.22 ; J4.3@7125.04,3542.9 7076.42,3560.22 ; J4.3@7127.09,3550.41 7076.42,3560.22 ; J4.3@7127.99,3558.13 7076.42,3560.22 ; J4.3@7162.52,3550.41 7152.7,3560.22 6811.83,3560.22 ; v1(6663.3,3522.6) 6714.8,3518.67 ; v1(6663.3,3522.6) 6714.24,3519.64 ; v1(6663.3,3522.6) C40.1@6670.64,3505.04 ; v1(6663.3,3522.6) 6728.98,3518.67 ; v1(6663.3,3522.6) C40.1@6672.93,3539.82 ; v1(6663.3,3522.6) 6728.98,3518.67 ; C40.1@6663.4,3513.6 6714.8,3518.67 ; C40.1@6663.37,3513.6 6728.98,3518.67 ; C40.1@6663.37,3513.6 6728.98,3518.67 ; C40.1@6670.64,3505.04 6728.98,3518.67 ; C40.1@6672.93,3539.82 6728.98,3518.67 ; 6728.98,3518.67 6664.45,3531.53 6728.98,3518.67
  Bottom Layer w12: v1@3776.16,5157.84 3822.46,5191.46 v1@3788.84,5145.16 ; v1(3782,5151) 3834,5203 3867.43,5203 3874.43,5210 6276.52,5210 6437,5049.52 6437,3586 6500.4,3522.6 v1(6663.3,3522.6) 6612.3,3522.6 ; v1@6662.5,3513.64 6612.3,3522.6 ; v1@6662.5,3531.57 6612.3,3522.6
KJ_A4: C44.1 J4.4 R47.1 U5.92 | length 8411.4
  Top Layer w10: U5.92@2425.44,4927.03 2643.42,4927.03 2679.04,4891.41 3286.87,4891.41 3336.46,4941 3652,4941 3817,5106 ; U5.92@2464.69,4927.03 2500.44,4927.03 ; v1@3807.2,5129 3817,5106 ; v1(3817,5131) 3817,5106 ; v1@3826.8,5129 3817,5106 ; C44.1@6873.97,3512.62 6921.39,3520.74 ; C44.1@6873.97,3532.58 6921.39,3524.46 ; C44.1@6874.74,3512.7 6921.39,3524.46 ; C44.1@6874.74,3532.5 6921.39,3520.74 ; C44.1@6879.22,3522.6 6932.84,3522.6 ; C44.1@6879.92,3514.01 6932.84,3522.6 ; C44.1@6879.92,3531.2 6932.84,3522.6 ; C44.1@6882.46,3504.26 6932.84,3522.6 ; C44.1@6882.46,3540.94 6932.84,3522.6 ; R47.1@6971.81,3500.61 6922.56,3522.6 ; R47.1@6974.49,3537.19 6922.56,3522.6 ; R47.1@6975.04,3510.14 6922.56,3522.6 ; R47.1@6976.3,3527.29 6922.56,3522.6 ; R47.1@6976.36,3518.66 6922.56,3522.6 ; R47.1@6983.91,3510.05 7038.39,3512.3 ; R47.1@6984.23,3518.66 7038.39,3512.3 ; R47.1@6985.25,3500.07 7038.39,3512.3 ; R47.1@6985.91,3527.12 7038.39,3512.3 ; R47.1@6989.53,3536.52 7038.39,3512.3 ; J4.4@7121.98,3484.21 7090.3,3512.3 ; J4.4@7130.62,3499.39 7090.3,3512.3 ; J4.4@7162.52,3491.35 7111.24,3491.35 ; v1(6873.32,3522.6) 6918.32,3522.6 ; v1(6873.32,3522.6) 6921.39,3520.74 ; v1(6873.32,3522.6) 6921.39,3524.46 ; v1(6873.32,3522.6) 6976.36,3522.6 R47.1@6980.3,3518.66 6986.66,3512.3 7090.3,3512.3 ; 6918.32,3522.6 6874.43,3512.66 6918.32,3522.6 ; 6918.32,3522.6 6874.43,3532.54 6918.32,3522.6 ; 7090.3,3512.3 J4.4@7127.09,3491.35 ; 7090.3,3512.3 7111.24,3491.35 ; 7111.24,3491.35 J4.4@7127.09,3491.35 ; 7111.24,3491.35 7124.66,3499.79 7111.24,3491.35 ; 7111.24,3491.35 7124.66,3482.91 7111.24,3491.35 ; 7111.24,3491.35 J4.4@7127.09,3491.35
  Bottom Layer w10: v1@3811.25,5139.18 3855.43,5164.13 ; v1@3824.24,5124.11 3855.43,5164.13 ; v1@6865.59,3528.95 6837.1,3486.39 v1@6879.66,3514.88 ; v1(6873.32,3522.6) 6792.57,3441.85 6544.15,3441.85 6418,3568 6418,5041.65 6268.65,5191 3882.3,5191 3822.3,5131 v1(3817,5131) 3855.43,5164.13
KJ_A5: C33.1 J4.5 R24.1 U5.91 | length 8608.6
  Top Layer w10: U5.91@2425.44,4907.35 2637.65,4907.35 2676.7,4868.3 3289.21,4868.3 3343.91,4923 3680,4923 v1(3815,5058) 3778.79,5021.79 ; U5.91@2464.69,4907.35 2500.44,4907.35 ; v1@3807.27,5064.35 3778.79,5021.79 ; v1@3821.35,5050.27 3778.79,5021.79 ; C33.1@6654.93,3320.17 C33.1@6672.2,3329.98 ; C33.1@6662.36,3303.01 6711.36,3310.28 ; C33.1@6662.61,3303.02 6722.83,3312.3 ; C33.1@6662.68,3322.97 6709.6,3314.27 ; C33.1@6662.81,3303.04 6706.99,3312.09 ; C33.1@6662.84,3322.96 6722.83,3312.3 ; C33.1@6662.86,3303.05 6706.94,3312.3 ; C33.1@6663.17,3322.92 6706.94,3312.3 ; C33.1@6663.21,3303.09 6709.6,3314.27 ; C33.1@6663.21,3322.91 6706.99,3312.09 ; C33.1@6663.45,3322.88 6711.36,3310.28 ; C33.1@6669.2,3311.6 6722.83,3312.3 ; C33.1@6669.78,3320.21 6722.83,3312.3 ; C33.1@6670.01,3303.02 6722.83,3312.3 ; C33.1@6671.48,3310.13 C33.1@6672.2,3329.98 ; C33.1@6672.3,3312.3 6766.3,3312.3 6775.3,3321.3 6775.3,3341.3 ; C33.1@6672.67,3293.31 6722.83,3312.3 ; R24.1@6756.49,3313.39 6775.3,3341.3 ; R24.1@6761.57,3289.66 6712.48,3312.3 ; R24.1@6764.71,3326.22 6712.48,3312.3 ; R24.1@6764.92,3299.16 6712.48,3312.3 ; R24.1@6765.7,3309.05 6775.3,3341.3 ; R24.1@6766.34,3307.67 6712.48,3312.3 ; R24.1@6766.39,3316.29 6712.48,3312.3 ; R24.1@6774.21,3307.67 6775.3,3341.3 ; R24.1@6782.79,3308.49 6775.3,3341.3 ; R24.1@6792.26,3312.24 6775.3,3341.3 ; J4.5@7126.21,3423.56 7083.31,3432.3 ; J4.5@7126.21,3441.03 7083.31,3432.3 ; J4.5@7127.09,3432.3 7083.31,3432.3 ; J4.5@7162.52,3432.3 7074.3,3432.3 7017.3,3375.3 6809.3,3375.3 6775.3,3341.3 ; v1(6661.9,3313) 6706.94,3312.3 ; v1(6661.9,3313) 6706.99,3312.09 ; v1(6661.9,3313) 6711.36,3310.28 ; v1(6661.9,3313) 6709.6,3314.27 ; v1(6661.9,3313) C33.1@6672.2,3329.98 ; v1(6661.9,3313) 6722.83,3312.3 ; C33.1@6672.2,3329.98 6722.83,3312.3
  Bottom Layer w10: v1@3815.98,5048.05 3835.6,5055 ; v1@3818.78,5067.26 3835.6,5055 ; v1@6659.39,3303.32 6642,3313 ; v1@6659.39,3322.68 6642,3313 ; v1@6660.64,3303.08 6622.09,3313 ; v1@6660.64,3322.92 6622.09,3313 ; 3835.6,5055 v1(3815,5058) 3815,5056 3814,5055 3835.6,5055 ; 3835.6,5055 3935.6,5155 6253.73,5155 6382,5026.73 6382,3553.09 6622.09,3313 ; 6622.09,3313 v1(6661.9,3313) 6642,3313 ; 6622.09,3313 6642,3313
KJ_A6: C37.1 J4.6 R32.1 U5.88 | length 8201.6
  Top Layer w10: U5.88@2425.44,4848.29 3294.66,4848.29 3341.37,4895 3691.6,4895 3848,5051.4 v1(3848,5107) ; U5.88@2464.69,4848.29 2500.44,4848.29 ; v1@3838.06,5105.89 3848,5062 v1@3857.94,5105.89 ; C37.1@6873,3320.68 6921.31,3317.19 ; C37.1@6873.32,3311.6 v1(6873.32,3310.68) ; C37.1@6873.48,3320.68 6918.19,3314.96 ; C37.1@6873.84,3320.67 6921.22,3313.19 ; C37.1@6874.88,3300.81 6921.22,3313.19 ; C37.1@6875.36,3300.89 6918.19,3314.96 ; C37.1@6875.68,3300.97 6921.31,3317.19 ; C37.1@6879.16,3320.23 6933.72,3316.3 ; C37.1@6879.22,3311.6 6933.72,3316.3 ; C37.1@6880.64,3303.1 6933.72,3316.3 ; C37.1@6880.81,3330.16 6933.72,3316.3 ; C37.1@6883.95,3293.59 6933.72,3316.3 ; C37.1@6895.3,3316.3 7020.3,3316.3 ; R32.1@6970.36,3290.04 6922.13,3316.3 ; R32.1@6974.34,3299.28 6922.13,3316.3 ; R32.1@6976.12,3326.29 6922.13,3316.3 ; R32.1@6976.36,3307.67 6922.13,3316.3 ; R32.1@6977.04,3316.26 6922.13,3316.3 ; R32.1@6983.21,3316.23 7020.3,3316.3 ; R32.1@6984.23,3307.67 7020.3,3316.3 ; R32.1@6984.59,3326.28 7020.3,3316.3 ; R32.1@6987.2,3299.57 7020.3,3316.3 ; R32.1@6992.98,3291.22 7020.3,3316.3 ; J4.6@7126.21,3364.5 7083.31,3373.24 ; J4.6@7126.21,3381.98 7083.31,3373.24 ; J4.6@7127.09,3373.24 7083.31,3373.24 ; J4.6@7162.52,3373.24 7077.24,3373.24 7020.3,3316.3 ; v1(6873.32,3310.68) 6918.19,3314.96 ; v1(6873.32,3310.68) 6921.22,3313.19 ; v1(6873.32,3310.68) 6921.31,3317.19
  Bottom Layer w10: v1@3840.65,5113.78 3878.88,5147.88 ; v1@3856.53,5101.78 3878.88,5147.88 ; v1@6865.47,3304.48 6843,3341 ; v1(6873.32,3310.68) 6843,3341 ; v1@6879.52,3318.53 6843,3341 ; 3878.88,5147.88 v1(3848,5107) 3848,5117 3904,5173 6261.19,5173 6400,5034.19 6400,3560.54 6619.54,3341 6843,3341
KJ_A7: C41.1 J4.7 R40.1 U5.85 | length 9295.4
  Top Layer w10: U5.85@2425.44,4789.24 3743.24,4789.24 3873,4919 v1@3873,5010 ; U5.85@2464.69,4789.24 2500.44,4789.24 ; v1@3863.06,5011.89 3873,4968 ; v1(3873,5013) 3873,4968 ; v1@3882.94,5011.89 3873,4968 ; C41.1@6656.08,3105.22 C41.1@6671.51,3114.08 ; C41.1@6663.3,3095.6 v1(6663.3,3098.3) ; C41.1@6663.88,3088.31 6713.14,3096.21 ; C41.1@6664.06,3108.27 6709.85,3099.74 ; C41.1@6664.14,3088.33 6722.9,3098.3 ; C41.1@6664.14,3108.26 6722.9,3098.3 ; C41.1@6664.24,3088.34 6708.64,3097.58 ; C41.1@6664.41,3088.36 6708.3,3098.3 ; C41.1@6664.41,3108.24 6708.3,3098.3 ; C41.1@6664.56,3108.22 6708.64,3097.58 ; C41.1@6664.68,3088.39 6709.85,3099.74 ; C41.1@6664.72,3108.2 6713.14,3096.21 ; C41.1@6667.3,3098.3 6773.3,3098.3 6773.3,3119.3 ; C41.1@6669.2,3095.6 6722.9,3098.3 ; C41.1@6669.46,3104.22 6722.9,3098.3 ; C41.1@6670.32,3087.05 6722.9,3098.3 ; C41.1@6673.11,3096.36 C41.1@6671.51,3114.08 ; C41.1@6673.34,3077.45 6722.9,3098.3 ; R40.1@6758.84,3102.17 6800.18,3146.18 ; R40.1@6760.94,3073.84 6712.33,3098.3 ; R40.1@6764.61,3083.22 6712.33,3098.3 ; R40.1@6765.41,3110.26 6712.33,3098.3 ; R40.1@6766.34,3091.67 6712.33,3098.3 ; R40.1@6766.71,3095.92 6800.18,3146.18 ; R40.1@6766.71,3100.28 6712.33,3098.3 ; R40.1@6782.24,3088.52 6800.18,3146.18 ; R40.1@6792.06,3086.34 6800.18,3146.18 ; J4.7@7126.21,3305.45 7083.31,3314.18 ; J4.7@7126.21,3322.92 7083.31,3314.18 ; J4.7@7127.09,3314.18 7083.31,3314.18 ; J4.7@7162.52,3314.18 7082.18,3314.18 7029.3,3261.3 7029.3,3180.3 7009.3,3160.3 6814.3,3160.3 6773.3,3119.3 ; v1(6663.3,3098.3) 6708.3,3098.3 ; v1(6663.3,3098.3) 6708.64,3097.58 ; v1(6663.3,3098.3) 6713.14,3096.21 ; v1(6663.3,3098.3) 6709.85,3099.74 ; v1(6663.3,3098.3) C41.1@6671.51,3114.08 ; v1(6663.3,3098.3) 6722.9,3098.3 ; C41.1@6671.51,3114.08 6722.9,3098.3 ; 6773.3,3119.3 R40.1@6774.21,3091.67 ; 6773.3,3119.3 6782.68,3093.29 6773.3,3119.3 ; 6773.3,3119.3 6765.66,3092.73 6773.3,3119.3 ; 6773.3,3119.3 6791.53,3098.52 6773.3,3119.3 ; 6773.3,3119.3 6756.48,3097.35 6773.3,3119.3 ; 6773.3,3119.3 R40.1@6774.21,3091.67 ; R40.1@6774.21,3091.67 6800.18,3146.18
  Bottom Layer w10: v1(3873,5013) 3898,5013 ; v1@3875,5003.2 3898,5013 ; v1@3875,5022.8 3898,5013 ; v1@6662.19,3088.36 6618.3,3098.3 ; v1@6662.19,3108.24 6618.3,3098.3 ; 3898,5013 3984,5099 4020.53,5099 4021.53,5098 4200.47,5098 4201.47,5099 6258.82,5099 6346,5011.82 6346,3302 6549.7,3098.3 v1(6663.3,3098.3) 6618.3,3098.3
KJ_A8: C45.1 J4.8 R48.1 U5.84 | length 9013.6
  Top Layer w10: U5.84@2425.44,4769.55 3749.01,4769.55 ; U5.84@2464.69,4769.55 2500.44,4769.55 ; 3749.01,4771.24 3750.7,4771.24 3901,4921.54 3901,5072 v1(3898,5075) 3901,5029.7 ; v1@3888.16,5073.24 3901,5029.7 ; v1@3907.99,5074.56 3901,5029.7 ; C45.1@6864.54,3090.8 C45.1@6877.78,3077.04 ; C45.1@6871.78,3085.72 6919.49,3083.38 ; C45.1@6872,3085.69 6942.94,3081.3 ; C45.1@6872.5,3085.64 6917.86,3086.93 ; C45.1@6872.98,3085.61 6922.16,3088.95 ; C45.1@6875.66,3105.32 6922.16,3088.95 ; C45.1@6876.01,3105.23 6942.94,3081.3 ; C45.1@6876.3,3105.15 6917.86,3086.93 ; C45.1@6876.87,3104.95 6919.49,3083.38 ; C45.1@6877.89,3087.08 6942.94,3081.3 ; C45.1@6879.22,3095.6 6942.94,3081.3 ; C45.1@6881.66,3103.87 6942.94,3081.3 ; C45.1@6883.31,3095.31 C45.1@6877.78,3077.04 ; C45.1@6885.85,3113.01 6942.94,3081.3 ; C45.1@6902.3,3081.3 6988.3,3081.3 6990.3,3083.3 6990.3,3090.3 7053.3,3153.3 7053.3,3231.3 7077.13,3255.13 J4.8@7162.52,3255.13 ; R48.1@6969.83,3109.1 6922.11,3081.3 ; R48.1@6974.08,3099.98 6922.11,3081.3 ; R48.1@6974.4,3107.48 7032.9,3132.9 ; R48.1@6976.36,3091.66 6922.11,3081.3 ; R48.1@6976.72,3073.05 6922.11,3081.3 ; R48.1@6977.31,3083.1 6922.11,3081.3 ; R48.1@6979.12,3098.6 7032.9,3132.9 ; R48.1@6984.23,3091.66 7032.9,3132.9 ; R48.1@6990.24,3085.48 7032.9,3132.9 ; R48.1@6998.22,3079.37 7032.9,3132.9 ; J4.8@7126.21,3246.39 7083.31,3255.13 ; J4.8@7126.21,3263.87 7083.31,3255.13 ; J4.8@7127.09,3255.13 7083.31,3255.13 ; v1(6873.32,3095.6) 6917.86,3086.93 ; v1(6873.32,3095.6) 6919.49,3083.38 ; v1(6873.32,3095.6) 6922.16,3088.95 ; v1(6873.32,3095.6) C45.1@6877.78,3077.04 ; v1(6873.32,3095.6) 6942.94,3081.3 ; C45.1@6877.78,3077.04 6942.94,3081.3
  Bottom Layer w10: v1@3890.36,5081.45 3926.48,5116.48 ; v1@3891.5,5081.5 3934,5124 6259.28,5124 6364,5019.28 6364,3541 6625,3280 6808,3280 6873.32,3214.68 v1(6873.32,3095.6) ; v1(3898,5075) 3926.48,5116.48 ; v1@3906.77,5070.19 3926.48,5116.48 ; v1@6863.38,3096.71 6873.32,3140.6 v1@6883.26,3096.71
KJ_B1: C34.1 J5.1 R25.1 U5.41 | length 5355.6
  Top Layer w10: J5.1@-111.93,3196.07 -40.07,3196.07 ; J5.1@-76.5,3196.07 -40.07,3196.07 ; J5.1@-75.44,3187.36 -40.07,3196.07 ; J5.1@-75.44,3204.79 -40.07,3196.07 ; R25.1@294.48,3064.22 269.11,3009.09 ; R25.1@303.24,3059.27 269.11,3009.09 ; R25.1@310.01,3053.93 269.11,3009.09 ; R25.1@315.95,3047.68 269.11,3009.09 ; R25.1@317.88,3053.93 371.5,3053.93 ; R25.1@318.57,3045.33 371.5,3053.93 ; R25.1@318.57,3062.52 371.5,3053.93 ; R25.1@321.11,3035.59 371.5,3053.93 ; R25.1@321.11,3072.26 371.5,3053.93 ; R25.1@321.67,3039.41 269.11,3009.09 ; C34.1@409.84,3075.92 360.61,3053.93 ; C34.1@412.52,3039.33 360.61,3053.93 ; C34.1@413.07,3066.38 360.61,3053.93 ; C34.1@414.33,3049.24 360.61,3053.93 ; C34.1@414.39,3057.86 360.61,3053.93 ; C34.1@422.81,3067.65 375.57,3052.62 ; C34.1@422.93,3067.67 379.02,3053.93 ; C34.1@423.2,3067.72 379.86,3055.33 ; C34.1@423.73,3067.8 374.18,3057.15 ; C34.1@424.01,3047.9 374.18,3057.15 ; C34.1@424.31,3047.88 379.86,3055.33 ; C34.1@424.63,3047.86 379.02,3053.93 ; C34.1@424.91,3047.86 375.57,3052.62 ; v1@998,4509.4 1277.84,4789.24 U5.41@1819.15,4789.24 ; 1744.15,4789.24 U5.41@1779.9,4789.24 ; -40.07,3196.07 -12,3168 -12,3065 62,2991 251.02,2991 R25.1@313.94,3053.93 416.36,3053.93 C34.1@420.3,3057.86 v1(424.86,3057.86) ; 374.18,3057.15 v1(424.86,3057.86) ; 375.57,3052.62 v1(424.86,3057.86) ; 379.02,3053.93 v1(424.86,3057.86) ; 379.86,3055.33 v1(424.86,3057.86)
  Bottom Layer w10: v1(424.86,3057.86) 951.86,3057.86 1007,3113 1007,4486 ; v1@425.97,3047.92 469.86,3057.86 v1@425.97,3067.8 ; v1@982.37,4496.74 1007,4486 ; v1(988,4505) 1007,4486 ; v1@996.26,4510.63 1007,4486
KJ_B2: C38.1 J5.2 R33.1 U5.42 | length 5453.2
  Top Layer w10: J5.2@-111.93,3255.13 -16.13,3255.13 21,3218 21,3075 42.07,3053.93 ; J5.2@-76.5,3255.13 -32.72,3255.13 ; J5.2@-75.62,3246.39 -32.72,3255.13 ; J5.2@-75.62,3263.87 -32.72,3255.13 ; R33.1@89.98,3035.61 42.07,3053.93 ; R33.1@89.98,3072.24 42.07,3053.93 ; R33.1@92.63,3045.33 42.07,3053.93 ; R33.1@92.63,3062.52 42.07,3053.93 ; R33.1@93.36,3053.93 42.07,3053.93 ; R33.1@101.23,3053.93 154.85,3053.93 ; R33.1@101.93,3045.33 154.85,3053.93 ; R33.1@101.93,3062.52 154.85,3053.93 ; R33.1@104.47,3035.59 154.85,3053.93 ; R33.1@104.47,3072.26 154.85,3053.93 ; C38.1@193.2,3075.92 143.96,3053.93 ; C38.1@195.88,3039.33 143.96,3053.93 ; C38.1@196.43,3066.38 143.96,3053.93 ; C38.1@197.68,3049.24 143.96,3053.93 ; C38.1@197.74,3057.86 143.96,3053.93 ; C38.1@199.71,3053.93 R33.1@97.3,3053.93 42.07,3053.93 ; C38.1@204.79,3067.64 158.19,3052.68 ; C38.1@204.92,3067.67 161.16,3053.93 ; C38.1@205.17,3067.72 161.88,3055.24 ; C38.1@205.69,3067.79 157.02,3057.03 ; C38.1@206.02,3047.9 157.02,3057.03 ; C38.1@206.33,3047.87 161.88,3055.24 ; C38.1@206.63,3047.86 161.16,3053.93 ; C38.1@206.9,3047.86 158.19,3052.68 ; v1@964.13,4440.73 1014.98,4463.38 ; v1@975.36,4424.28 1014.98,4463.38 ; v1@976,4424.4 v1@976.3,4424.7 ; 1744.15,4769.55 U5.42@1779.9,4769.55 ; U5.42@1819.15,4769.55 1321.15,4769.55 983.6,4432 v1(969,4432) 1014.98,4463.38 ; 157.02,3057.03 v1(206.86,3057.86) ; 158.19,3052.68 v1(206.86,3057.86) ; 161.16,3053.93 v1(206.86,3057.86) ; 161.88,3055.24 v1(206.86,3057.86)
  Bottom Layer w10: v1(206.86,3057.86) 385.26,3057.86 425.4,3098 943,3098 989,3144 989,4406 ; v1@207.97,3047.92 251.86,3057.86 v1@207.97,3067.8 ; v1@962.1,4424.77 989,4406 ; v1(969,4432) 989,4406 ; v1@976,4419 989,4406 ; v1@977.76,4436.82 989,4406